# Altium PCB KODO频谱时钟 2022-07-24.pcbdoc
Units mil, origin at the board's own origin, x right, y up, seen from the top; angles counter-clockwise.
Board outline 2818.5 x 2847.64 mil, 2 copper layers (Top Layer, Bottom Layer); 41 components, 40 nets, 154 pads, 59 vias.
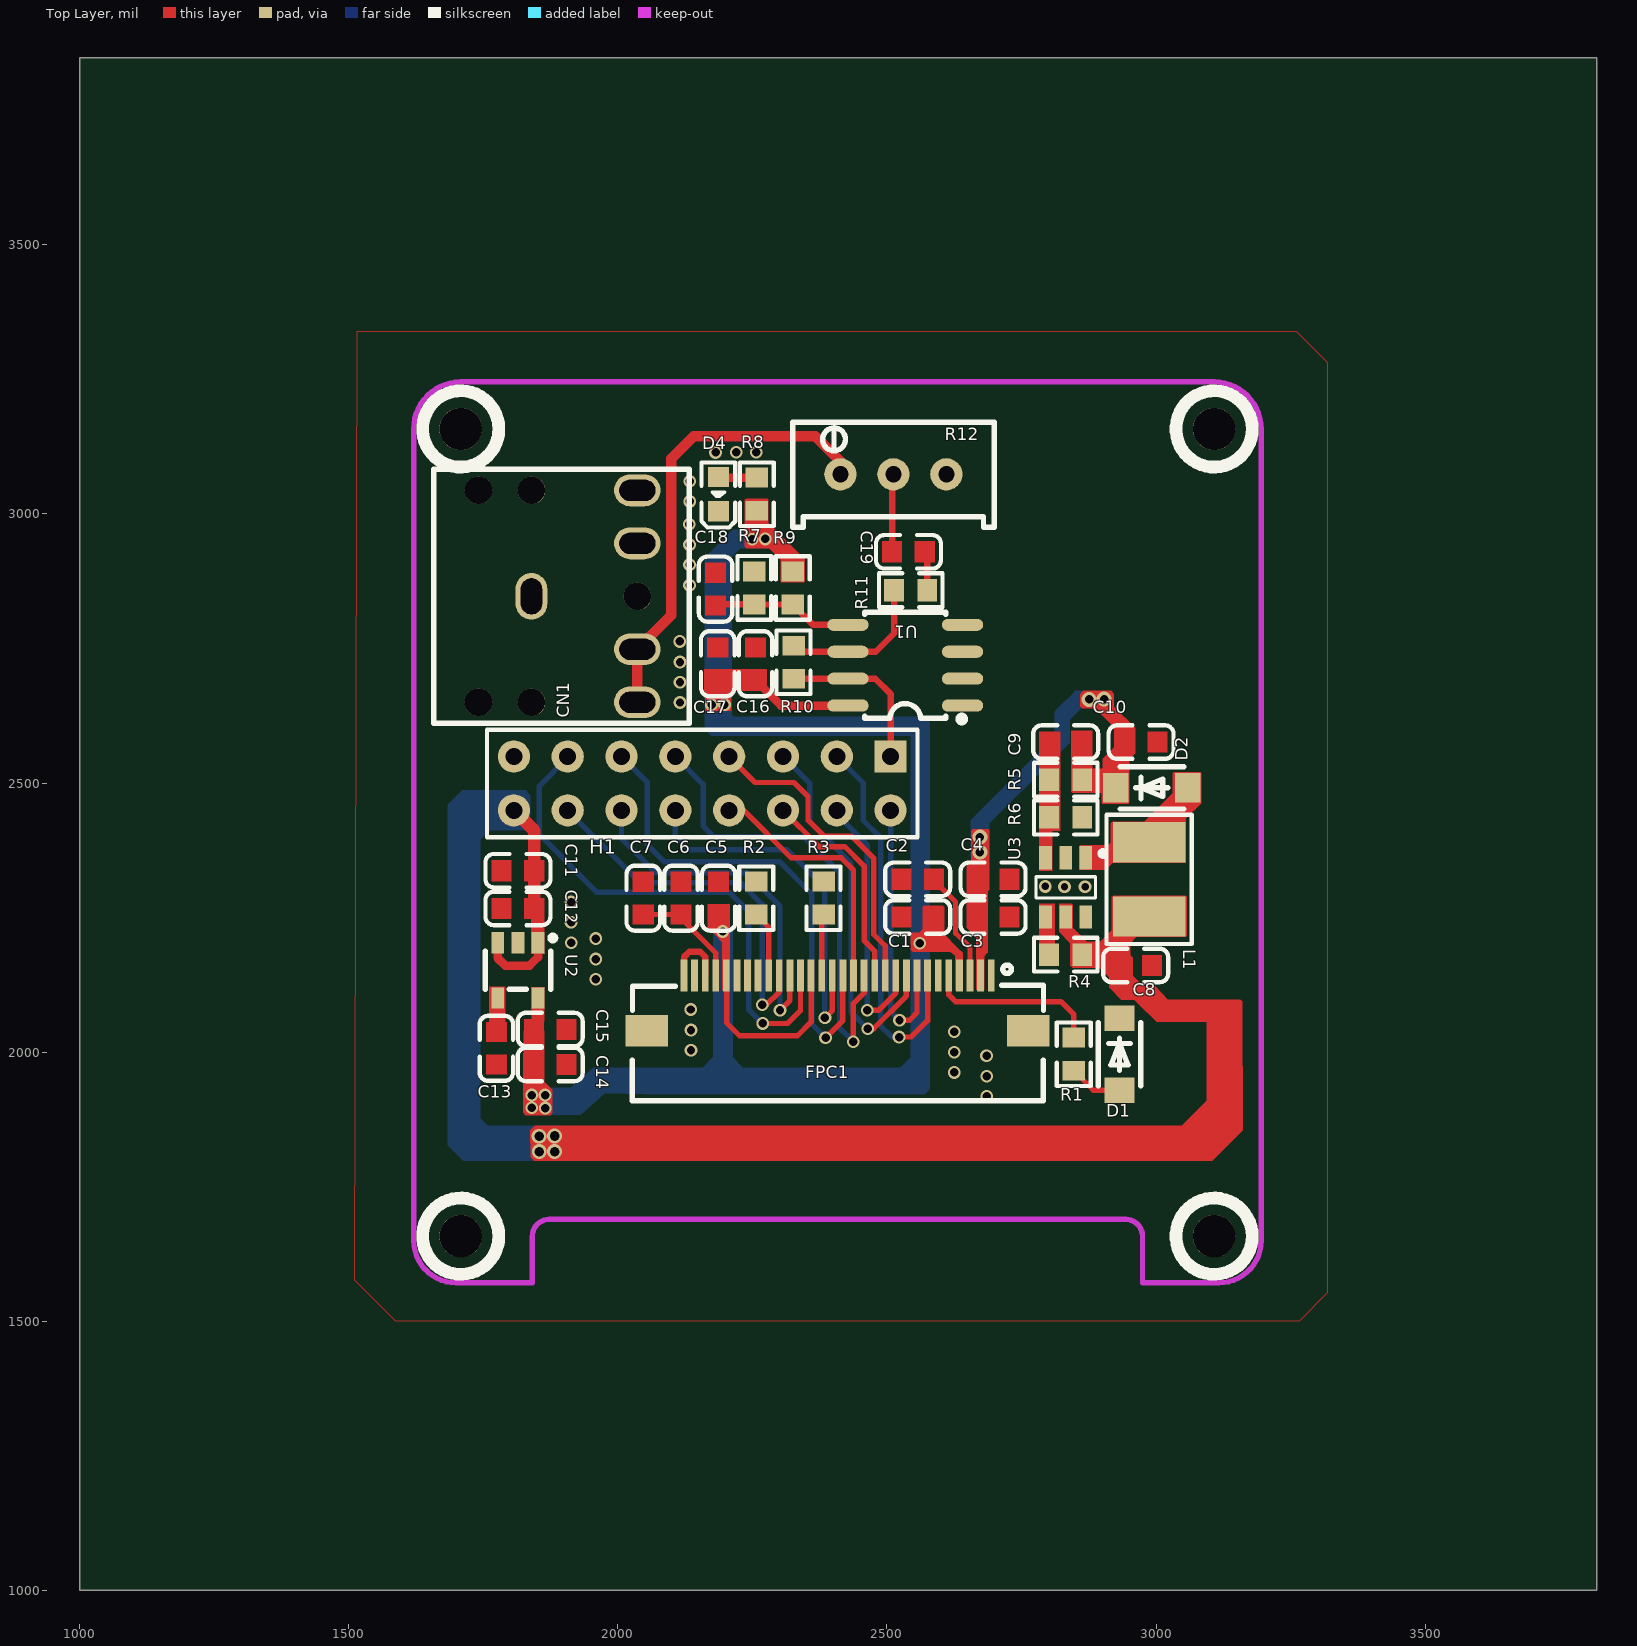
[diagram p0: Top Layer view]
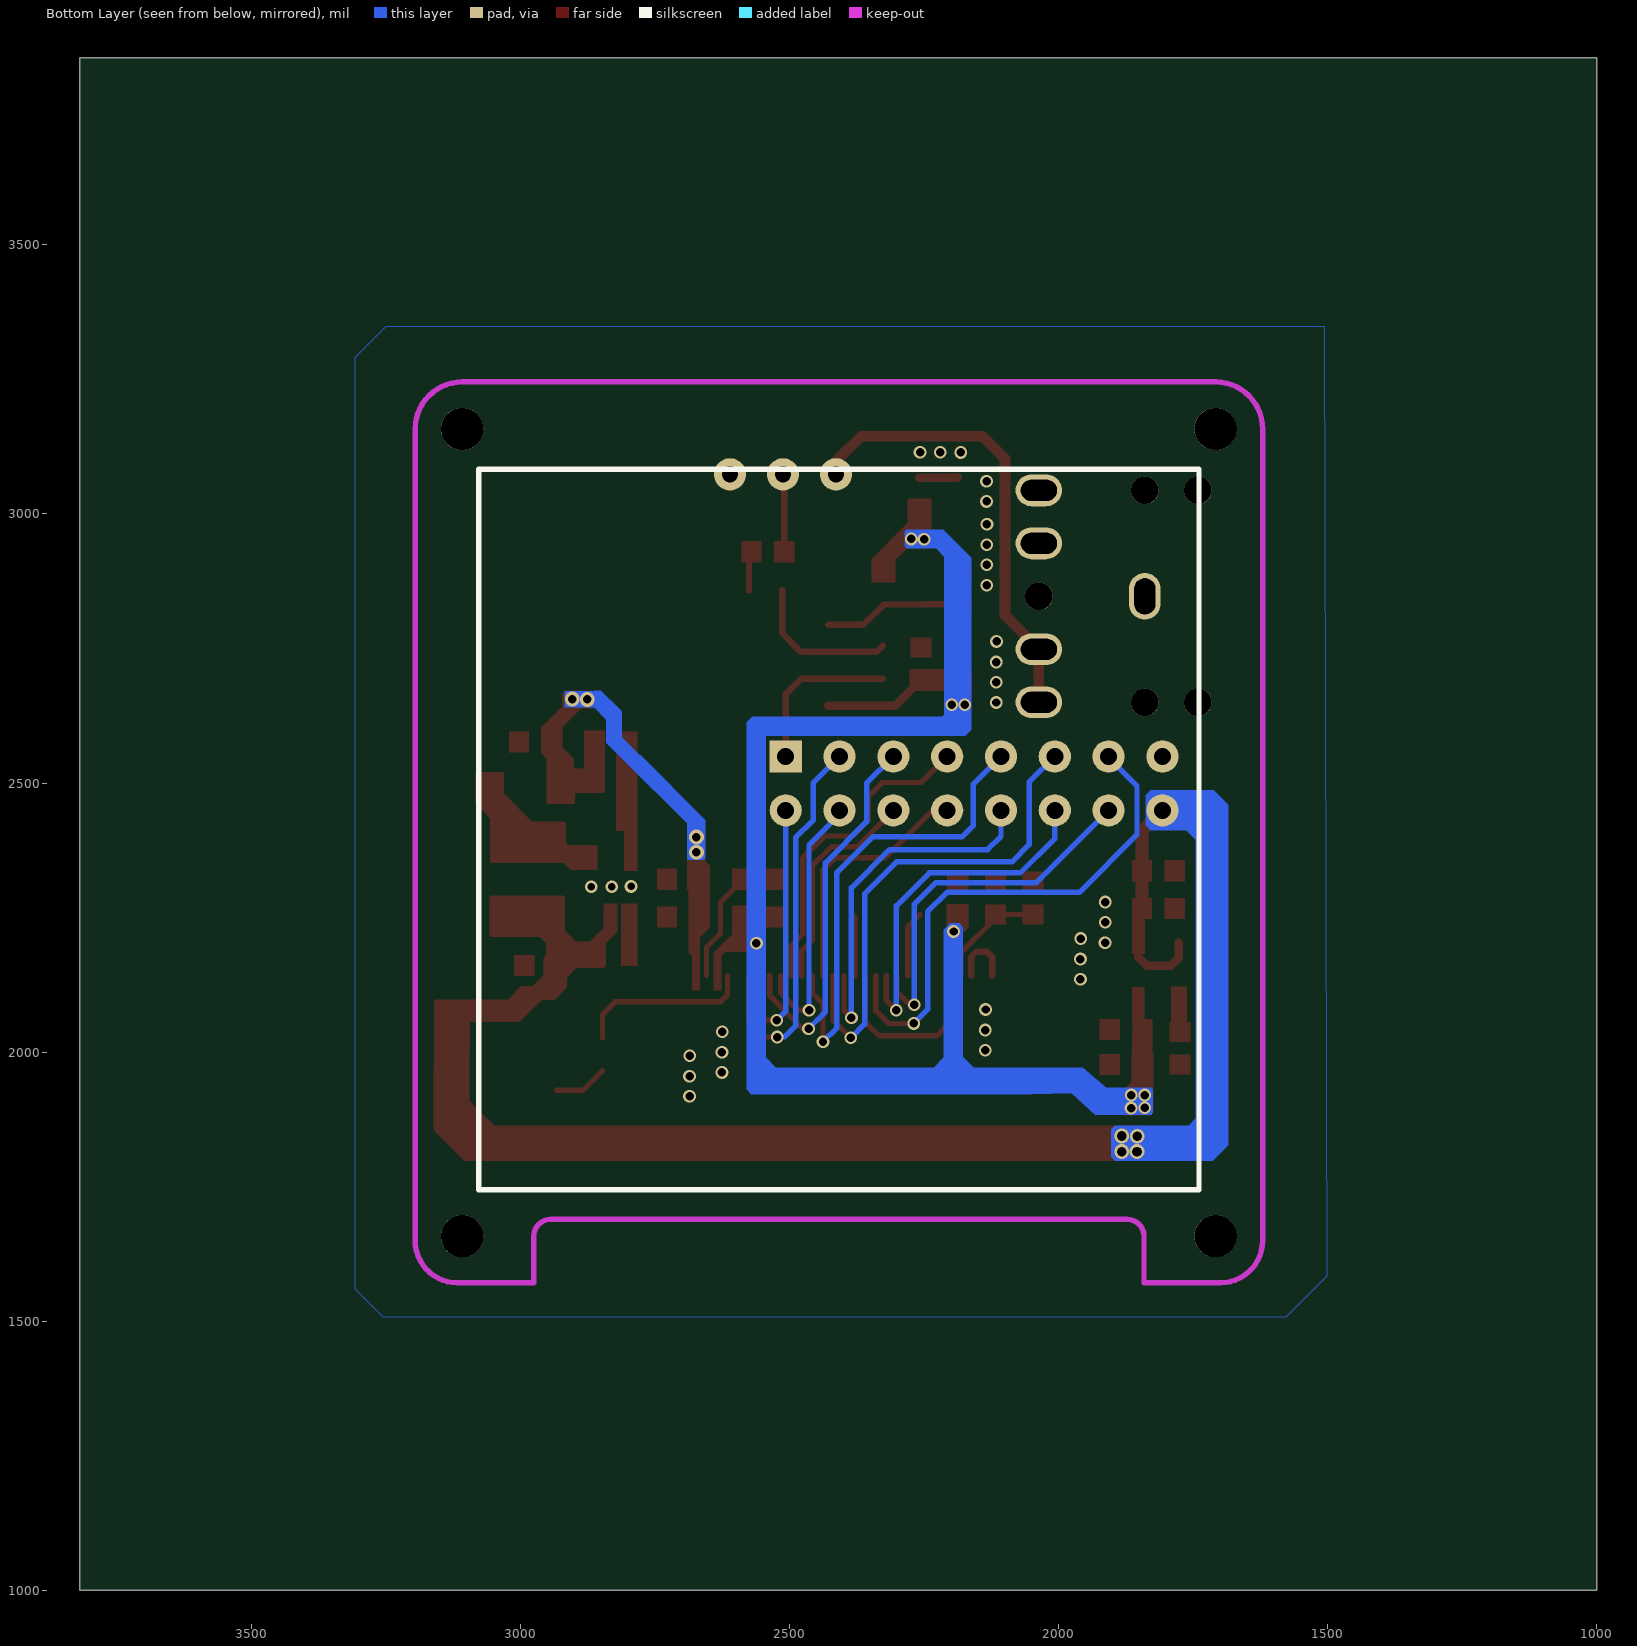
[diagram p1: Bottom Layer view, seen from below]

## Layer stack, top to bottom
Top Layer: signal copper (thickness not stored)
Dielectric: dielectric 12.6, FR-4, Dk 4.8
Bottom Layer: signal copper (thickness not stored)

## Board outline
3818.5,1000 1000,1000 1000,3847.64 3818.5,3847.64

## Components (designator, comment, footprint, x,y, rotation, side; value= is the part's Value field where it differs from the comment)
C1 "1uF" "C  0603" 2557.09,2251.03 r0 top
C2 "4.7uF" "C  0603" 2557.09,2321.03 r0 top
C3 "10uF" "C  0603" 2697.09,2251.03 r180 top
C4 "0.1uF" "C  0603" 2697.09,2321.03 r180 top
C5 "1uF" "C  0603" 2187.09,2286.03 r90 top
C6 "4.7uF" "C  0603" 2117.09,2286.03 r90 top
C7 "0.1uF" "C  0603" 2047.09,2286.03 r90 top
C8 "22uF" "C  0603" 2962.09,2161.03 r0 top
C9 "15pF" "C  0603" 2832.09,2576.03 r180 top
C10 "22uF" "C  0603" 2972.09,2576.03 r0 top
C11 "0.1uF" "C  0603" 1814.17,2336.97 r180 top
C12 "22uF" "C  0603" 1814.17,2266.97 r180 top
C13 "22nF" "C  0603" 1774.17,2006.97 r270 top
C14 "22uF" "C  0603" 1874.17,2041.97 r0 top
C15 "0.1uF" "C  0603" 1874.17,1976.97 r0 top
C16 "10uF" "C  0603" 2255.51,2721.65 r90 top
C17 "0.1uF" "C  0603" 2185.43,2721.65 r90 top
C18 "22uF" "C  0603" 2181.49,2860.24 r270 top
C19 "10uF" "C  0603" 2539.76,2929.53 r180 top
CN1 "PJ-307G5" AUDIO-TH_PJ-307G5 1937.8,2846.85 r0 top
D1 "DSK34" SOD-123 2932.09,1996.03 r90 top
D2 "DSK34" SOD-123 2992.09,2491.03 r180 top
D4 "LED  0603" "LED 0603" 2186.61,3036.22 r270 top
FPC1 "OLED-1.5寸全彩" "FPC-SMD 30P-P0.50" 2407.87,2057.88 r0 top
H1 "MCU接口" 排针排母2*8P 2156.69,2499.21 r270 top
L1 "4.7uH,4A" D-L1812-1 2987.09,2321.03 r90 top
R1 "51R" "R 0603" 2847.09,1996.03 r90 top
R2 "560K" "R 0603" 2257.09,2286.03 r270 top
R3 "10K" "R 0603" 2382.09,2286.03 r270 top
R4 "100K" "R 0603" 2832.09,2181.03 r180 top
R5 "620K" "R 0603" 2832.09,2506.03 r0 top
R6 "30K" "R 0603" 2832.09,2436.03 r0 top
R7 "10K" "R 0603" 2253.54,2862.6 r90 top
R8 "1.5K" "R 0603" 2258.27,3036.61 r270 top
R9 "10K" "R 0603" 2324.8,2862.2 r270 top
R10 "51K" "R 0603" 2326.38,2724.41 r90 top
R11 "3.6K" "R 0603" 2544.09,2858.27 r180 top
R12 "50kΩ" RES-ADJ-TH_3P-L9.5-W4.85-P2.50-BL-BS 2511.81,3073.62 r90 top
U1 "TDA1308T/N2,115" SOIC-8_L5.0-W4.0-P1.27-LS6.0-BL 2533.86,2718.9 r90 top
U2 "RT9193-33GB" SOT-23-5_L3.0-W1.7-P0.95-LS2.8-BR 1814.17,2151.97 r90 top
U3 "SX1308" SOT23-6 2832.09,2306.03 r90 top

## Footprints (in the part's own frame and the unit in brackets; to place one, negate y for a bottom-side part, rotate by r counter-clockwise, add the part's x,y. Pads: shape width x height; smd on the part's side, far side on the other; paste and mask are expansions set on the pad)
AUDIO-TH_PJ-307G5 [mm]
  oval 1.5x2.2 hole 1 slot 1.7 at 90 deg: 1(-2.5,0)
  oval 2.2x1.5 hole 1 slot 1.7 at 0 deg: 2(2.5,-5) 3(2.5,5) 4(2.5,-2.5) 5(2.5,2.5)
  round 1.3 hole 1.3 unplated: ""(-5,-5) ""(-5,5) ""(-2.5,-5) ""(-2.5,5) ""(2.5,0)
  silkscreen extent -7.11,-5.99 4.95,5.99
"C  0603" [mil]
  round 0 smd: 1(-30.31,0) 2(30.32,0)
  Top Layer region: -48.62,19.29 -12.01,19.29 -12.01,-19.29 -48.62,-19.29
  Top Layer region: 12.01,19.29 48.62,19.29 48.62,-19.29 12.01,-19.29
  silkscreen extent -60,-31 60,31
D-L1812-1 [mm]
  rect 1.9x3.42 smd: 1(-1.75,0) 2(1.75,0)
  silkscreen extent -3.05,-2.01 3.05,2.01
"FPC-SMD 30P-P0.50" [mm]
  rect 0.32x1.5 smd: 1(7.258,2.14) 2(6.758,2.14) 3(6.258,2.14) 4(5.758,2.14) 5(5.258,2.14) 6(4.758,2.14) 7(4.258,2.14) 8(3.758,2.14) 9(3.258,2.14) 10(2.758,2.14) 11(2.258,2.14) 12(1.758,2.14) 13(1.258,2.14) 14(0.758,2.14) 15(0.258,2.14) 16(-0.242,2.14) 17(-0.742,2.14) 18(-1.242,2.14) 19(-1.742,2.14) 20(-2.242,2.14) 21(-2.742,2.14) 22(-3.242,2.14) 23(-3.742,2.14) 24(-4.242,2.14) 25(-4.742,2.14) 26(-5.242,2.14) 27(-5.742,2.14) 28(-6.242,2.14) 29(-6.742,2.14) 30(-7.242,2.14)
  rect 0.3x1.5 smd: 10(2.75,2.14) 14(0.75,2.14)
  rect 2x1.5 smd: 31(-8.992,-0.46) 32(9.008,-0.46)
  round 2 hole 2 unplated: ""(-17.78,-10.16) ""(-17.78,27.94) ""(17.78,-10.16) ""(17.78,27.94)
  Keep-Out Layer lines w0.254: -20.001,-10.361 -20.001,27.939 ; -18,-12.36 -14.4,-12.36 ; -17.78,30.16 17.779,30.16 ; -14.4,-10.16 -14.399,-12.361 ; -13.6,-9.36 13.6,-9.36 ; 14.4,-10.16 14.4,-12.361 18,-12.36 ; 19.999,-10.361 19.999,27.939 ; 19.999,27.939 19.999,27.939
  Keep-Out Layer lines w0.254: -20.001,27.939 cw(c-17.78,27.939) -17.78,30.16 ; -19.998,-10.362 ccw(c-17.998,-10.362) -17.998,-12.362 ; -14.4,-10.16 cw(c-13.6,-10.16) -13.6,-9.36 ; 13.6,-9.36 cw(c13.6,-10.16) 14.4,-10.16 ; 17.779,30.16 cw(c17.779,27.939) 19.999,27.939 ; 18.002,-12.362 ccw(c18.002,-10.362) 20.002,-10.362
  silkscreen extent -19.58,-11.96 19.58,29.74
"LED 0603" [mm]
  rect 0.96x1 smd: 1(-0.82,0) 2(0.8,0)
  silkscreen extent -1.51,-0.8 1.56,0.8
"R 0603" [mm]
  rect 0.94x1.06 smd: 1(-0.78,0) 2(0.78,0)
  silkscreen extent -1.5,-0.8 1.5,0.8
RES-ADJ-TH_3P-L9.5-W4.85-P2.50-BL-BS [mil]
  round 60 hole 30: 1(0,98.43) 2(0,0) 3(0,-98.42)
  silkscreen extent -98,-187 96,187
SOD-123 [mm]
  rect 1.2x1.4 smd: 1(-1.7,0) 2(1.7,0)
  silkscreen extent -1.5,-1 1.5,1
SOIC-8_L5.0-W4.0-P1.27-LS6.0-BL [mil]
  oval 22.38x76.78 smd: 1(-75,-106.5) 2(-25,-106.5) 3(25,-106.5) 4(75,-106.5) 5(75,106.5) 6(25,106.5) 7(-25,106.5) 8(-75,106.5)
  silkscreen extent -106,-111 98,75
SOT23-6 [mm]
  rect 1.1x0.6 smd: 1(1.4,-0.95) 2(1.4,0) 3(1.4,0.95) 4(-1.4,0.95) 5(-1.4,0) 6(-1.4,-0.95)
  silkscreen extent -0.5,-1.87 1.73,1.4
SOT-23-5_L3.0-W1.7-P0.95-LS2.8-BR [mm]
  rect 1x0.6 smd: 1(1.3,-0.95) 2(1.3,0) 3(1.3,0.95) 4(-1.3,0.95) 5(-1.3,-0.95)
  silkscreen extent -0.9,-1.78 1.65,1.55
排针排母2*8P [mm]
  rect 1.52x1.52 hole 0.8: 1(-1.27,8.89)
  round 1.52 hole 0.8: 2(1.27,8.89) 3(-1.27,6.35) 4(1.27,6.35) 5(-1.27,3.81) 6(1.27,3.81) 7(-1.27,1.27) 8(1.27,1.27) 9(-1.27,-1.27) 10(1.27,-1.27) 11(-1.27,-3.81) 12(1.27,-3.81) 13(-1.27,-6.35) 14(1.27,-6.35) 15(-1.27,-8.89) 16(1.27,-8.89)
  silkscreen extent -2.54,-10.16 2.54,10.16

## Via types
v1: diameter 23.62, hole 15.75, Top Layer to Bottom Layer, tented both sides, 48 vias
v2: diameter 27.56, hole 15.75, Top Layer to Bottom Layer, tented both sides, 4 vias
v3: diameter 27.56, hole 17.72, Top Layer to Bottom Layer, tented both sides, 4 vias
v4: diameter 23.62, hole 13.78, Top Layer to Bottom Layer, tented both sides, 3 vias

## Nets (pads, with @x,y where several pads share a name; then routed paths per layer and width w, separated by ;. In a path a pad name is that pad's centre, name@x,y a point inside that pad or via, vN(x,y) a via of type N, cw(c..) or ccw(c..) an arc to the next point about the centre after c; other vN are vias at no path point)
3V3: C1.2 C5.1 C14.1 C15.1 C16.1 C17.1 FPC1.4 FPC1.18 FPC1.26 R8.2 R9.1 U1.8 U2.5 | length 545.3
  Top Layer w10: FPC1.26@2202.27,2144.49 2202.27,2054.03 2225.98,2030.32 2333.46,2030.32 2358.97,2055.82 FPC1.18
  Top Layer w15.75: C16.1 2302.96,2643.89 U1.8
  other v1: 1839.77,1896.45 1864.96,1896.07 1839.77,1920.08 1864.57,1920.08 2561.03,2202.36 2194.84,2224.05 2174.01,2645.28 2198.03,2645.66 2249.61,2953.14 2273.62,2953.55
5V: C8.1 C11.1 C12.1 H1.16 L1.1 R4.1 U2.1 U2.3 U3.5 | length 340.4
  Top Layer w15.75: U2.3 1776.79,2174.43 1790.59,2160.62 1835.79,2160.62 1851.59,2176.43 U2.1
  Top Layer w23.62: H1.16 1844.48,2411.43 C11.1 C12.1
  other v3: 1853.93,1814.96 1882.29,1814.96 1853.55,1843.7 1882.29,1844.1
13V: C3.2 C4.2 C9.1 C10.1 D2.2 FPC1.2 R5.2
  other v2: 2672.57,2371.32 2672.74,2399.47 2875.53,2655.43 2903.47,2655.82
ADC: H1.1 R10.1 U1.7 | length 308.3
  Top Layer w11.81: R10.1 U1.7 ; U1.7 2478.15,2693.89 2506.7,2665.35 H1.1
C19_1: C19.1 R11.1 | length 73.2
  Top Layer w11.81: C19.1 2574.8,2924.8 R11.1
C19_2: C19.2 R12.2 | length 145.1
  Top Layer w11.81: C19.2 2509.44,3071.25 R12.2
CN1_3: CN1.3
CN1_5: CN1.5
CS: FPC1.19 H1.13 | length 979.3
  Top Layer w10: v1(2268.89,2053.14) 2315.39,2053.12 2339.28,2077.02 FPC1.19
  Bottom Layer w10: H1.13 1906.68,2547.22 1853.98,2494.53 1853.98,2403.93 1960.98,2296.82 2207.09,2296.82 2242.89,2261.03 2242.89,2079.12 v1(2268.89,2053.14)
D0: FPC1.14 H1.8 | length 473.1
  Top Layer w10: H1.8 2233.88,2449.23 2322.09,2361.03 2414.99,2361.03 2437.7,2338.3 FPC1.14@2437.7,2142.12
D1: FPC1.13 H1.9 | length 895.5
  Top Layer w10: v1(2437.41,2019.3) 2437.39,2090.12 2457.39,2110.12 FPC1.13
  Bottom Layer w10: H1.9 2158.28,2497.62 2158.28,2420.43 2178.78,2400.03 2345.28,2400.03 2411.78,2333.43 2411.78,2044.92 v1(2437.41,2019.3)
D2: FPC1.12 H1.6 | length 405.4
  Top Layer w10: H1.6 2374.39,2381.53 2421.68,2381.53 2457.49,2345.62 2457.49,2207.52 2477.07,2187.93 FPC1.12
D3: FPC1.11 H1.7 | length 599.4
  Top Layer w10: H1.7 2255.09,2500.82 2327.18,2500.82 2353.19,2474.82 2353.19,2431.12 2382.69,2401.53 2433.88,2401.53 2475.19,2360.22 2475.19,2218.93 2496.76,2197.36 FPC1.11
D4: FPC1.10 H1.4 | length 494
  Top Layer w10: v1@2463.39,2077.53 2484.28,2077.53 2516.49,2109.72 FPC1.10@2516.49,2142.12
  Bottom Layer w10: H1.4 2406.69,2441.34 2463.39,2384.64 v1(2463.39,2077.55)
D4_1: D4.1 R8.1 | length 72.1
  Top Layer w15.75: D4.1 2187.79,3067.33 R8.1
D5: FPC1.9 H1.5 | length 706.2
  Top Layer w10: v1(2464.18,2043.31) 2475.18,2043.33 2536.09,2104.22 FPC1.9
  Bottom Layer w10: H1.5 2356.28,2499.62 2356.28,2428.32 2433.09,2351.53 2433.09,2074.43 v1(2464.18,2043.31)
D6: FPC1.8 H1.2 | length 504.3
  Top Layer w10: v1@2523.19,2059.03 2541.38,2059.03 2555.82,2073.46 FPC1.8
  Bottom Layer w10: H1.2 2506.68,2075.62 v1@2523.18,2059.03
  other v1: 2523.22,2059.05
D7: FPC1.7 H1.3 | length 726.4
  Top Layer w10: v1@2522.39,2027.92 2544.89,2027.92 2575.49,2058.53 FPC1.7
  Bottom Layer w10: H1.3 2455.89,2500.03 2455.89,2430.72 2488.18,2398.43 2488.18,2048.82 2509.09,2027.92 v1@2522.39,2027.92
  other v1: 2522.43,2027.95
DC: FPC1.20 H1.12 | length 664.8
  Top Layer w10: v1(2301.18,2077.55) 2319.59,2095.97 FPC1.20
  Bottom Layer w10: H1.12 2006.68,2397.22 2070.89,2333.03 2239.78,2333.03 2301.18,2271.62 v1@2301.18,2077.53
FPC1_3: C2.2 FPC1.3 | length 206.6
  Top Layer w9.45: C2.2 2587.41,2318.89 2627.56,2278.74 2627.56,2220.87 2654.24,2194.19 FPC1.3
FPC1_5: FPC1.5 R1.2 | length 326.2
  Top Layer w10: FPC1.5 2614.86,2106.39 2627.56,2093.7 2823.22,2093.7 2847.09,2069.84 R1.2
FPC1_17: FPC1.17 R3.2 | length 114.6
  Top Layer w10: FPC1.17@2378.66,2142.12 2378.66,2251.89 R3.2
FPC1_22: FPC1.22 R2.2 | length 122.8
  Top Layer w10: R2.2 2280.22,2232.18 FPC1.22
FPC1_27: C6.1 C7.1 FPC1.27 | length 210.4
  Top Layer w10: C7.1 C6.1 2117.09,2248.66 2181.8,2183.95 FPC1.27
GND: C1.1 C2.1 C3.1 C4.1 C5.2 C6.2 C7.2 C8.2 C10.2 C11.2 C12.2 C13.2 C14.2 C15.2 C16.2 C17.2 C18.1 CN1.1 D1.2 D4.2 FPC1.1 FPC1.28 FPC1.30 FPC1.31 FPC1.32 H1.15 R2.1 R3.1 R6.2 R7.2 R12.3 U1.4 U2.2 U3.2 | length 117.1
  Top Layer w11.81: FPC1.30 2122.73,2176.67 2132.68,2186.61 2152.76,2186.61 2162.11,2177.26 FPC1.28
  other v1: 2685.43,1917.71 2685.43,1955.12 2625.2,1962.2 2685.03,1993.31 2625.2,1999.61 2135.82,2003.55 2624.8,2037.8 2135.82,2040.94 2135.43,2079.14 1959.06,2135.43 1959.06,2172.84 1913.38,2203.14 1958.66,2211.03 1912.99,2241.34 1912.99,2278.74 2115.36,2649.61 2115.36,2687.41 2115.36,2724.8 2114.97,2762.99 2133.18,2867.59 2133.18,2905.39 2133.18,2942.8 2132.8,2980.99 2133.47,3023.22 2133.47,3060.62 2181.49,3114.18 2219.68,3114.57 2257.09,3114.57
  other v4: 2829.86,2306.99 2868.05,2306.99 2794.03,2307.78
R1_1: D1.1 R1.1 | length 100
  Top Layer w10: R1.1 2883.3,1929.1 D1.1
R12_1: CN1.2 CN1.4 R12.1 | length 853.8
  Top Layer w19.68: CN1.2 CN1.4 2099.18,2811.43 2099.18,3102.72 2140.99,3144.53 2366.49,3144.53 2413.39,3097.62 R12.1
RD: FPC1.15 H1.11 | length 934.7
  Top Layer w10: v1(2385.82,2026.38) 2418.03,2058.57 FPC1.15
  Bottom Layer w10: H1.11 2054.28,2501.62 2054.28,2385.43 2086.18,2353.53 2300.78,2353.53 2360.18,2294.12 2360.18,2051.93 v1@2385.78,2026.33
RST: FPC1.21 H1.14 | length 692
  Top Layer w10: v1(2268.11,2088.18) 2276.37,2088.19 2299.91,2111.73 FPC1.21
  Bottom Layer w10: H1.14 2040.98,2314.93 2227.59,2314.93 2268.09,2274.43 v1(2268.11,2088.18)
RW: FPC1.16 H1.10 | length 691.5
  Top Layer w10: v1(2384.64,2063.78) 2398.34,2077.46 FPC1.16
  Bottom Layer w10: H1.10 2106.68,2400.82 2131.49,2376.03 2313.78,2376.03 2384.68,2305.12 v1@2384.68,2063.72
S$1126: 
U1_1: U1.1
U1_2: U1.2
U1_3: U1.3
U1_5: C18.2 R7.1 R9.2 U1.5 | length 262.2
  Top Layer w11.81: C18.2 2183.47,2831.89 R7.1 ; R7.1@2253.59,2831.93 R9.2 2362.41,2793.89 U1.5
U1_6: R10.2 R11.2 U1.6 | length 286.1
  Top Layer w11.81: R10.2 2337.6,2743.89 U1.6 2479.33,2743.89 2513.39,2777.95 R11.2
U2_4: C13.1 U2.4
U3_1: D2.1 L1.2 U3.1
U3_3: C9.2 R5.1 R6.1 U3.3
U3_4: R4.2 U3.4
pads on no net: CN1. FPC1. FPC1.6 FPC1.23 FPC1.24 FPC1.25 FPC1.29 U3.6

## Polygon pours and split planes (outlines as drawn)
GND on Bottom Layer (solid): 1505.12,3347.64 3250,3347.64 3307.87,3289.76 3307.87,1560.63 3255.11,1507.88 1576.38,1507.88 1500,1584.25
GND on Top Layer (solid): 1515.75,3339.76 3260.63,3339.76 3318.5,3281.89 3318.5,1552.76 3265.74,1500 1587.01,1500 1510.63,1576.38

## Other copper
Top Layer:
  region net 3V3: 2235.83,3025.59 2235.83,2939.37 2238.58,2936.61 2281.1,2936.61 2302.76,2914.96 2302.76,2873.62 2303.54,2872.83 2345.67,2872.83 2347.24,2874.41 2347.24,2915.75 2279.53,2983.46 2279.53,3025.98 2277.16,3028.34 2238.19,3028.34 2235.83,3025.98
  region net 3V3: 1824.02,1994.88 1824.02,1887.8 1828.74,1883.07 1874.41,1883.07 1878.35,1887.01 1878.35,1929.92 1863.38,1944.88 1863.38,1998.43 1862.2,1999.61 1825.59,1999.61 1824.02,1998.03
  region net 5V: 1844.88,1797.64 1837.8,1804.72 1837.4,1855.12 1845.28,1862.99 1872.83,1863.39 3048.03,1863.39 3094.49,1909.84 3094.09,2096.85 3156.3,2097.24 3160.23,2094.09 3160.63,1854.33 3103.93,1797.64 1844.88,1797.64
  region net 13V: 2961.41,2594.88 2961.41,2602.36 2921.65,2642.12 2921.65,2666.14 2916.53,2671.26 2864.96,2671.26 2859.05,2665.35 2859.05,2642.91 2862.99,2638.98 2886.22,2638.98 2894.09,2631.1 2922.05,2603.15 2922.05,2590.94 2961.41,2590.94
  region net 5V: 2819.68,2275.2 2819.68,2223.23 2840.94,2201.97 2840.94,2160.63 2845.27,2156.3 2895.67,2156.3 2911.02,2140.95 2949.6,2140.95 2951.57,2142.91 2951.57,2202.36 2963.38,2214.17 3055.12,2214.17 3056.69,2215.75 3056.69,2288.98 3054.72,2290.95 2920.08,2290.95 2917.71,2288.58 2917.71,2226.38 2911.41,2220.08 2904.33,2212.99 2896.45,2205.12 2871.26,2205.12 2848.82,2227.56 2845.27,2231.1 2845.27,2273.62 2843.7,2275.2
  region net U3_1: 2857.48,2338.98 2906.3,2338.98 2919.29,2351.97 3054.33,2351.97 3055.51,2353.15 3055.51,2434.25 3083.86,2462.6 3083.86,2518.5 3082.67,2519.68 3032.68,2519.68 3030.71,2517.72 3030.71,2480.71 2978.34,2428.35 2918.89,2428.35 2915.35,2424.8 2915.35,2388.58 2911.02,2384.25 2858.66,2384.25 2857.08,2382.68 2857.08,2339.37 2857.48,2338.98
  region net 13V: 2842.52,2597.24 2842.52,2483.86 2844.09,2482.28 2896.85,2482.28 2898.82,2480.32 2898.82,2463.39 2900.39,2461.81 2948.42,2461.81 2950.39,2463.78 2950.39,2544.09 2961.41,2555.12 2961.41,2595.28 2960.23,2596.46 2923.62,2596.46 2922.05,2594.88 2922.05,2566.14 2902.75,2546.85 2900.78,2544.88 2900.78,2528.74 2898.82,2526.77 2883.46,2526.77 2881.1,2529.13 2881.1,2597.24
  region net 13V: 2686.22,2414.17 2687.79,2414.17 2689.76,2412.2 2689.76,2301.57 2688.19,2300 2649.6,2300 2648.03,2301.57 2648.03,2345.67 2650,2348.03 2656.3,2354.33 2656.3,2411.42 2659.05,2414.17
  region net 13V: 2648.03,2303.54 2648.03,2230.71 2650,2228.74 2666.14,2212.6 2666.14,2116.14 2667.32,2114.96 2679.13,2114.96 2680.31,2116.14 2680.31,2177.95 2684.64,2182.28 2687.01,2184.65 2687.01,2298.82 2689.76,2301.57 2689.76,2303.54
  region net 5V: 3096.45,2096.85 3022.04,2096.85 2998.82,2122.05 2976.77,2122.05 2967.32,2131.5 2956.69,2142.13 2956.69,2175.59 2951.18,2181.1 2912.99,2181.1 2909.84,2177.95 2909.84,2142.13 2913.38,2138.58 2913.38,2120.87 2935.43,2097.64 2959.05,2097.64 2966.14,2090.55 3001.18,2055.91 3098.03,2055.51 3107.08,2065.36 3107.08,2088.98
  region net 3V3: 2640.55,2115.36 2640.55,2184.65 2631.89,2193.31 2606.3,2218.9 2606.3,2269.68 2603.93,2272.05 2568.11,2272.05 2566.53,2270.47 2566.53,2228.74 2563.38,2225.59 2559.84,2222.05 2547.24,2222.05 2544.09,2218.9 2544.09,2190.55 2546.06,2188.58 2547.24,2187.4 2548.03,2186.61 2617.72,2186.61 2626.77,2178.74 2626.77,2175.2 2626.77,2115.36
  region net 3V3: 2167.32,2274.41 2167.32,2231.1 2183.46,2214.96 2190.55,2207.87 2194.09,2204.33 2194.09,2115.36 2207.48,2115.36 2207.48,2274.41
  rectangle net U3_3: 2782.09,2411.03 2822.09,2596.03
  rectangle net U3_3: 2782.09,2336.03 2807.09,2421.03
  rectangle net U3_4: 2782.09,2160.24 2812.59,2276.03
  rectangle net U2_4: 1760.63,2019.3 1790.95,2121.66
  rectangle net 5V: 1838.79,2182.68 1863.59,2251.97
  rectangle net 3V3: 1824.81,1970.87 1863.38,2040.15
  rectangle net 3V3: 1839.57,2056.7 1863.59,2121.26
  rectangle net 3V3: 2161.41,2633.86 2211.41,2711.41
  rectangle net 3V3: 2160.24,2671.26 2276.78,2712.2
Bottom Layer:
  region net 3V3: 2211.81,2656.3 2211.81,2726.77 2211.81,2783.07 2211.81,2920.86 2227.16,2936.22 2281.89,2936.22 2285.82,2940.16 2285.82,2966.93 2282.28,2970.47 2236.22,2970.47 2213.78,2970.47 2161.81,2918.5 2161.81,2658.27 2161.81,2651.18 2161.81,2633.46 2211.81,2633.46
  region net 3V3: 2579.13,2197.24 2579.13,2457.48 2579.13,2548.43 2579.53,2548.82 2579.53,2612.6 2569.29,2622.83 2423.23,2622.83 2216.14,2622.83 2211.81,2627.16 2211.81,2645.28 2211.81,2656.3 2209.84,2658.27 2163.39,2658.27 2161.81,2656.69 2161.81,2599.21 2173.23,2587.8 2543.3,2587.8 2543.7,2587.4 2543.7,2191.34 2548.42,2186.61 2568.11,2186.61 2572.05,2190.55 2579.13,2190.55
  region net 5V: 1892.12,1798.03 1712.99,1798.03 1684.25,1826.77 1684.25,2459.84 1711.02,2486.61 1828.35,2486.61 1837.4,2477.56 1837.4,2421.26 1828.35,2412.2 1762.6,2412.2 1744.49,2394.09 1744.49,1876.77 1757.87,1863.39 1894.88,1863.39 1901.57,1856.69 1901.57,1805.12 1894.49,1798.03
  region net 3V3: 2579.13,1930.71 2570.47,1922.05 2224.01,1922.05 2050.79,1922.05 1975.59,1923.62 1930.31,1883.07 1827.16,1883.86 1824.41,1887.01 1824.41,1930.71 1827.56,1933.46 1911.02,1933.46 1954.33,1970.87 1971.65,1970.87 2157.48,1970.87 2177.56,1990.95 2177.56,2231.89 2184.64,2238.98 2201.18,2238.98 2212.99,2227.17 2212.99,1990.16 2231.89,1971.26 2524.8,1971.26 2543.7,1990.16 2543.7,2212.2 2546.85,2215.36 2574.8,2215.36 2579.13,2211.02 2579.13,1930.71
  region net 13V: 2862.6,2671.26 2850,2671.26 2844.09,2665.35 2822.05,2643.31 2811.81,2633.07 2811.81,2585.43 2777.56,2551.18 2776.38,2551.18 2655.9,2430.71 2655.9,2359.84 2658.66,2357.09 2688.19,2357.09 2689.76,2358.66 2689.76,2424.8 2702.75,2437.8 2796.45,2531.5 2839.76,2574.8 2839.76,2617.72 2862.6,2640.55
  rectangle net 13V: 2862.2,2640.55 2918.11,2671.26